# Altium PCB PowerPlane.PcbDoc (part 1 of 2)
Units mm, origin at the board's own origin, x right, y up, seen from the top; angles counter-clockwise.
Board outline 140 x 96 mm, 2 copper layers (Top Layer, Bottom Layer); 117 components, 76 nets, 342 pads, 71 vias.
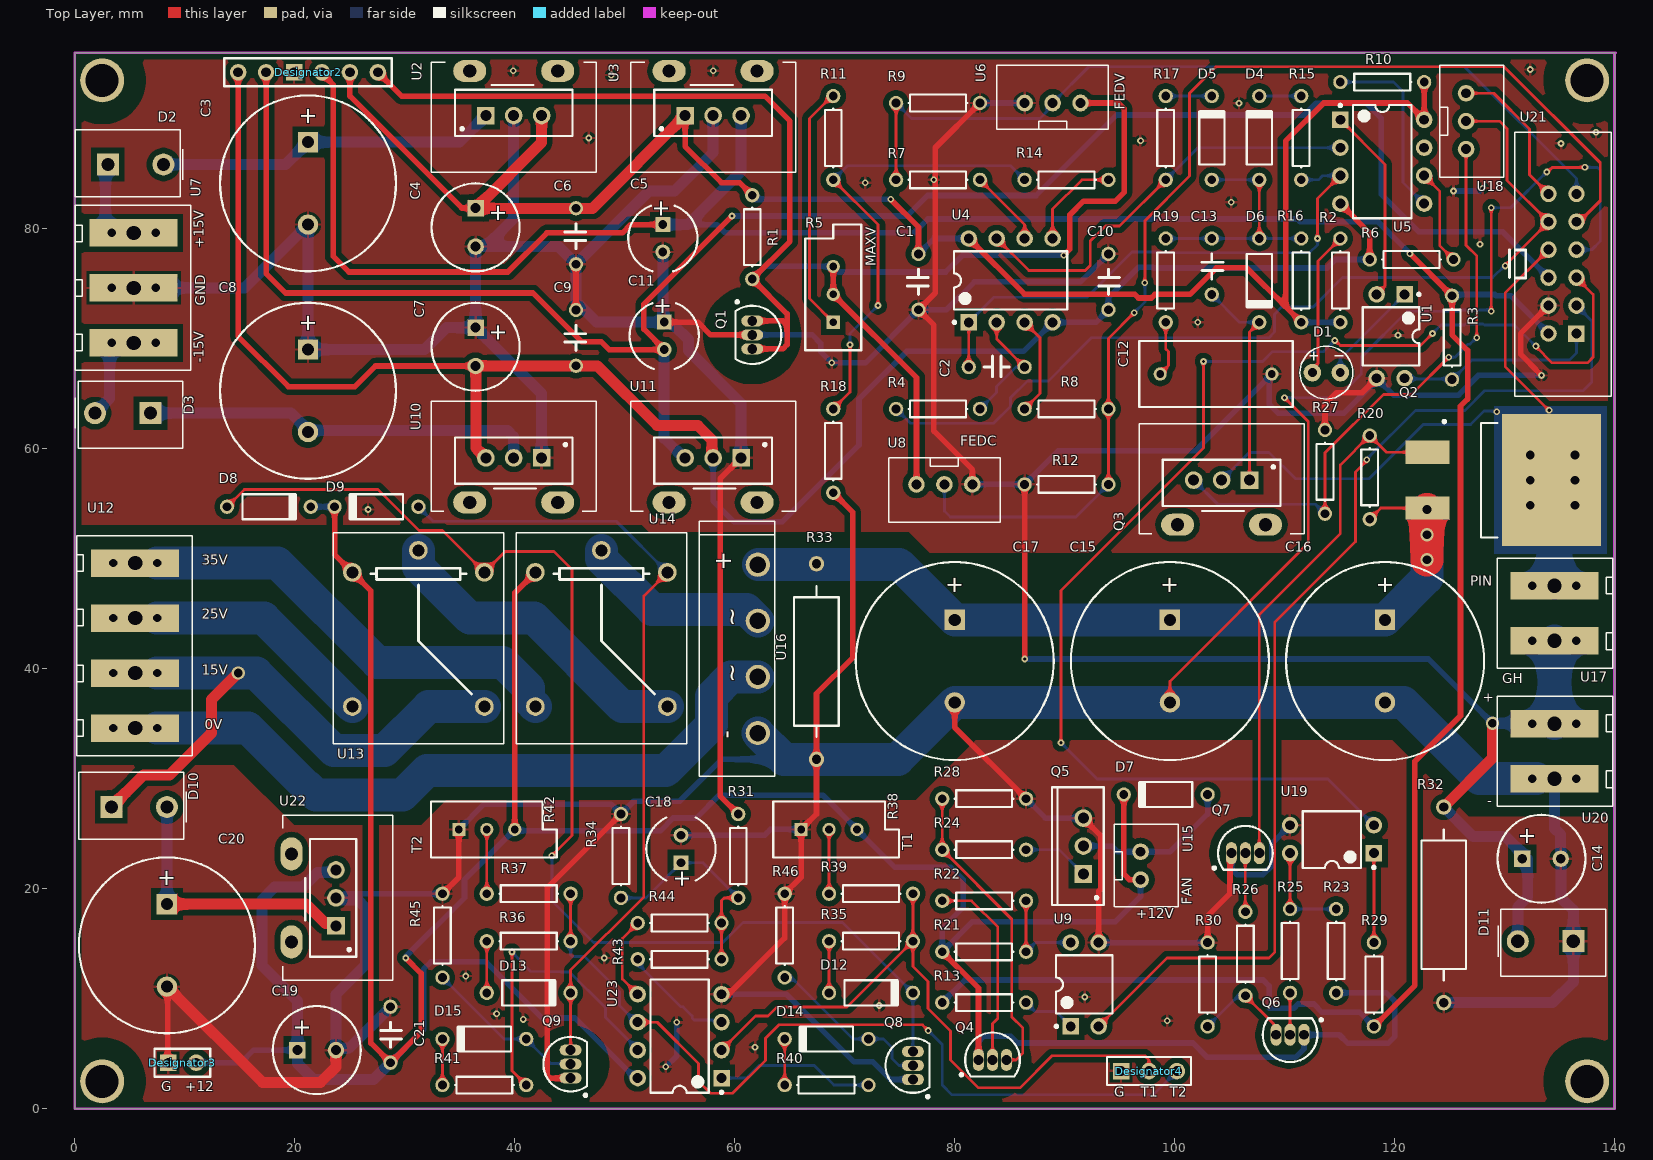
[diagram p0: Top Layer view]
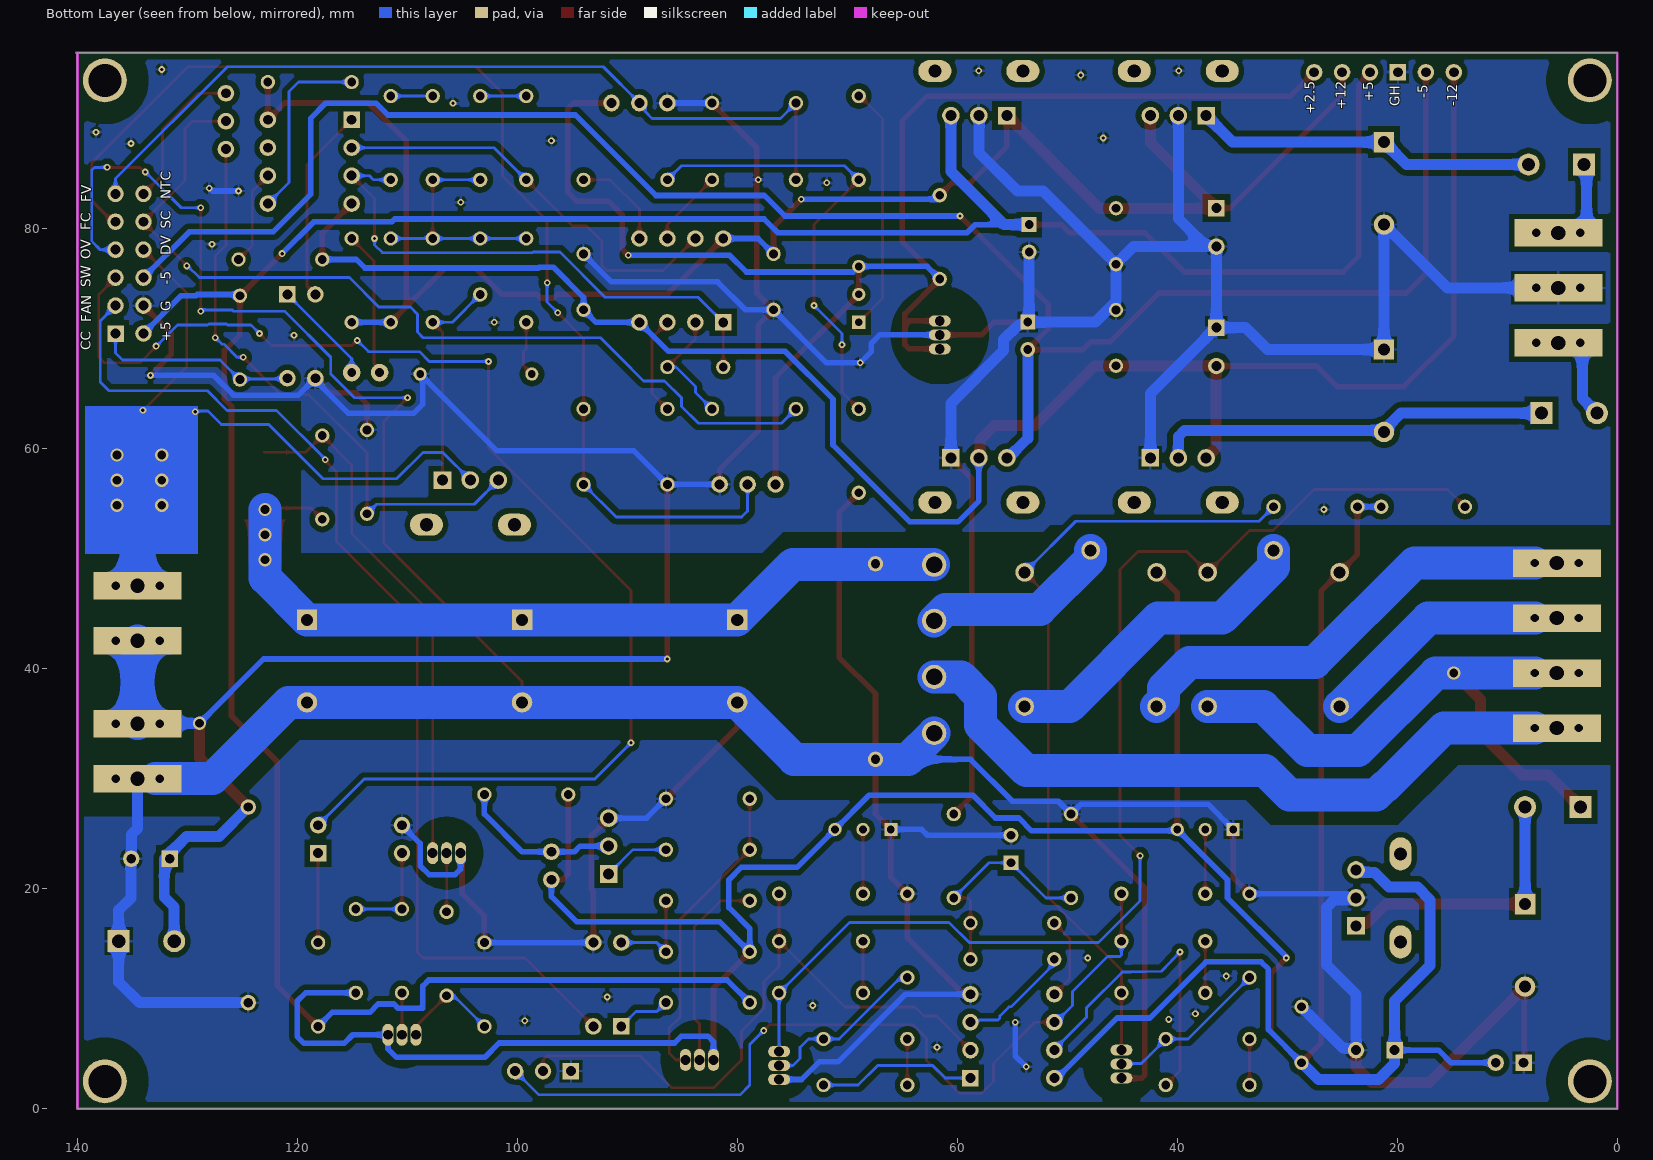
[diagram p1: Bottom Layer view, seen from below]

## Layer stack, top to bottom
Top Solder: solder mask 0.0102, Solder Resist, Dk 3.5
Top Layer: signal copper 0.0356
Dielectric 1: dielectric 0.32, FR-4, Dk 4.8
Bottom Layer: signal copper 0.0356
Bottom Solder: solder mask 0.0102, Solder Resist, Dk 3.5

## Board outline
0,0 0,96 140,96 140,0

## Design rules (kind name [scope] priority, off if disabled: settings)
Clearance Clearance_1 [WithinRoom('RoomDefinition1') or WithinRoom('RoomDefinition2') or  WithinRoom('RoomDefinition3') or  WithinRoom('RoomDefinition4') or  WithinRoom('RoomDefinition5') or  WithinRoom('RoomDefinition6') or WithinRoom('Corner1') or WithinRoom('Corner2') or        WithinRoom('Corner3') or        WithinRoom('Corner4') vs WithinRoom('RoomDefinition1') or WithinRoom('RoomDefinition2') or  WithinRoom('RoomDefinition3') or WithinRoom('RoomDefinition4') or  WithinRoom('RoomDefinition5') or  WithinRoom('RoomDefinition6') or WithinRoom('Corner1') or WithinRoom('Corner2') or        WithinRoom('Corner3') or        WithinRoom('Corner4')] p1: gap=0.15 ignorepadtopadclearanceinfootprint=TRUE
Clearance [Not (  WithinRoom('RoomDefinition4') or  WithinRoom('RoomDefinition5') or  WithinRoom('RoomDefinition6') or WithinRoom('Corner1') or WithinRoom('Corner2') or        WithinRoom('Corner3') or        WithinRoom('Corner4') ) vs Not (  WithinRoom('RoomDefinition4') or  WithinRoom('RoomDefinition5') or  WithinRoom('RoomDefinition6') or WithinRoom('Corner1') or WithinRoom('Corner2') or        WithinRoom('Corner3') or        WithinRoom('Corner4') )] p2: gap=0.508 ignorepadtopadclearanceinfootprint=TRUE except(1.016: Track-Track)
ComponentClearance [All] p1: gap=0.254 collisioncheckmode=3 verticalgap=0.254 showdistances=FALSE checkcomponentboundary=TRUE
Height [All] p1: minheight=0 maxheight=50.4 prefheight=12.7
HoleSize [All] p1: absolutevalues=TRUE maxlimit=3 minlimit=0.025 maxpercent=80.000 minpercent=20.000
MinimumSolderMaskSliver MinimumSolderMaskSliver_2 [HasFootprint('TO-226-AA') vs HasFootprint('TO-226-AA')] p1: minsoldermaskwidth=0.06
MinimumSolderMaskSliver MinimumSolderMaskSliver_1 [HasFootprint('TO-92A') vs HasFootprint('TO-92A')] p2: minsoldermaskwidth=0.06
MinimumSolderMaskSliver [All] p3: minsoldermaskwidth=0.254
PolygonConnect [All] p1: connectstyle=Relief reliefconductorwidth=0.254 reliefentries=4 polygonreliefangle="90 Angle" airgapwidth=0.254
RoomDefinition Corner4 [False] p1: confinementstyle=ConfineIn formatcopy=TRUE lockcomponents=FALSE outline 133.5,93.5 ccw(c137.5,93.5) 137.5,89.5 ccw(c137.5,93.5) 141.5,93.5 ccw(c137.5,93.5) 137.5,97.5 ccw(c137.5,93.5)
RoomDefinition Corner3 [False] p2: confinementstyle=ConfineIn formatcopy=TRUE lockcomponents=FALSE outline 133.5,2.5 ccw(c137.5,2.5) 137.5,-1.5 ccw(c137.5,2.5) 141.5,2.5 ccw(c137.5,2.5) 137.5,6.5 ccw(c137.5,2.5)
RoomDefinition Corner2 [False] p3: confinementstyle=ConfineIn formatcopy=TRUE lockcomponents=FALSE outline 2.5,-1.5 cw(c2.5,2.5) -1.5,2.5 cw(c2.5,2.5) 2.5,6.5 cw(c2.5,2.5) 6.5,2.5 cw(c2.5,2.5)
RoomDefinition Corner1 [False] p4: confinementstyle=ConfineIn formatcopy=TRUE lockcomponents=FALSE outline 2.5,89.5 cw(c2.5,93.5) -1.5,93.5 cw(c2.5,93.5) 2.5,97.5 cw(c2.5,93.5) 6.5,93.5 cw(c2.5,93.5)
RoomDefinition RoomDefinition1 [False] p5: confinementstyle=ConfineIn formatcopy=TRUE lockcomponents=FALSE outline 61.595,65.858 cw(c61.595,70.358) 57.095,70.358 cw(c61.595,70.358) 61.595,74.858 cw(c61.595,70.358) 66.095,70.358 cw(c61.595,70.358)
RoomDefinition RoomDefinition6 [False] p6: confinementstyle=ConfineIn formatcopy=TRUE lockcomponents=FALSE outline 107.34,6.731 ccw(c110.37,6.731) 110.37,3.702 ccw(c110.37,6.731) 113.399,6.731 ccw(c110.37,6.731) 110.37,9.76 ccw(c110.37,6.731)
RoomDefinition RoomDefinition5 [False] p7: confinementstyle=ConfineIn formatcopy=TRUE lockcomponents=FALSE outline 103.114,23.241 ccw(c106.426,23.241) 106.426,19.929 ccw(c106.426,23.241) 109.738,23.241 ccw(c106.426,23.241) 106.426,26.553 ccw(c106.426,23.241)
RoomDefinition RoomDefinition4 [False] p8: confinementstyle=ConfineIn formatcopy=TRUE lockcomponents=FALSE outline 79.629,4.445 ccw(c83.312,4.445) 83.312,0.762 ccw(c83.312,4.445) 86.995,4.445 ccw(c83.312,4.445) 83.312,8.128 ccw(c83.312,4.445)
RoomDefinition RoomDefinition3 [False] p9: confinementstyle=ConfineIn formatcopy=TRUE lockcomponents=FALSE outline 73.025,3.937 ccw(c76.2,3.937) 76.2,0.762 ccw(c76.2,3.937) 79.375,3.937 ccw(c76.2,3.937) 76.2,7.112 ccw(c76.2,3.937)
RoomDefinition RoomDefinition2 [False] p10: confinementstyle=ConfineIn formatcopy=TRUE lockcomponents=FALSE outline 41.565,4.064 ccw(c45.103,4.064) 45.103,0.526 ccw(c45.103,4.064) 48.641,4.064 ccw(c45.103,4.064) 45.103,7.602 ccw(c45.103,4.064)
RoutingVias [All] p1: holewidth=0.305 width=0.61 viastyle="Through Hole" minholewidth=0.305 minwidth=0.61 maxholewidth=1.2 maxwidth=0.85
SilkToSolderMaskClearance SilkToSolderMaskClearance_2 [HasFootprint('TO-226-AA') vs HasFootprint('TO-226-AA')] p1: minsilkscreentomaskgap=0.254 clearancetoexposedcopper=TRUE
SilkToSolderMaskClearance SilkToSolderMaskClearance_1 [HasFootprint('TO-92A') vs HasFootprint('TO-92A')] p2: minsilkscreentomaskgap=0.06 clearancetoexposedcopper=TRUE
SilkToSolderMaskClearance [IsPad] p3: minsilkscreentomaskgap=0.254 clearancetoexposedcopper=TRUE
SolderMaskExpansion [All] p1: expansion=0.102 istentingtop=FALSE
SupplyNets "Schematic Supply Nets_1" [InNet('GND')] p1: voltage=0.000
SupplyNets "Schematic Supply Nets" [InNet('+12')] p2: voltage=0.000
Width Width_1 [InNetClass('Power')] p1: maxlimit=3 minlimit=0.254 preferedwidth=0.508
Width [All] p2: maxlimit=3 minlimit=0.254 preferedwidth=0.254
25 further rules are at their usual default settings.

## Classes and differential pairs
net class Power: +2.5V_H +5V_H +12 +12V_H -5V_H -12V_H GND GND_H

## Components (designator, comment, footprint, x,y, rotation, side; value= is the part's Value field where it differs from the comment)
C1 "" RAD-0.2 76.708,75.184 r90 top value=104
C2 "BBC" RAD-0.2 83.82,67.437 r0 top value=471
C3 "35V" CAPPR7.5-16x25 21.209,84.137 r270 top value=3300uF
C4 "25V" CAPPR5-8x12 36.449,80.137 r270 top value=470uF
C5 "16V" CAPPR5-6.3x11 53.467,79.14 r270 top value=220uF
C6 "" RAD-0.2 45.571,79.329 r90 top value=104
C7 "25V" CAPPR5-8x12 36.449,69.278 r270 top value=470uF
C8 "35V" CAPPR7.5-16x25 21.209,65.278 r270 top value=3300uF
C9 "" RAD-0.2 45.571,70.086 r90 top value=104
C10 "" RAD-0.2 93.98,75.184 r270 top value=104
C11 "16V" CAPPR5-6.3x11 53.594,70.275 r270 top value=220uF
C12 "BBC" RAD-0.4-BBC 103.759,66.802 r0 top value=153
C13 "BBC" RAD-0.2 103.378,76.581 r270 top value=471
C14 "50V" CAPPR5-8x12 133.35,22.733 r0 top value=100uF
C15 "63V" CAPPR7.5-18x35.5 99.568,40.7 r270 top value=2200uF
C16 "63V" CAPPR7.5-18x35.5 119.126,40.7 r270 top value=2200uF
C17 "63V" CAPPR7.5-18x35.5 80.01,40.7 r270 top value=2200uF
C18 "50V" CAPPR5-6.3x15 55.118,23.622 r90 top value=47uF
C19 "25V" CAPPR5-8x12 21.999,5.334 r0 top value=470uF
C20 "35V" CAPPR7.5-16x25 8.382,14.859 r270 top value=3300uF
C21 "" RAD-0.2 28.702,6.731 r270 top value=104
D1 "CC" LED 113.792,66.929 r90 top
D2 "1N5408" DIO18.84-9.6x5.6-Vetical 5.016,85.852 r0 top
D3 "1N5408" DIO18.84-9.6x5.6-Vetical 4.889,63.246 r180 top
D4 "1N4007" DO-41 107.696,88.265 r90 top
D5 "1N4007" DO-41 103.378,88.265 r90 top
D6 "1N4007" DO-41 107.696,75.311 r270 top
D7 "1N4007" DO-41 99.187,28.575 r180 top
D8 "1N4007" DO-41 17.653,54.737 r0 top
D9 "1N4007" DO-41 27.432,54.737 r180 top
D10 "1N5408" DIO18.84-9.6x5.6-Vetical 5.334,27.432 r0 top
D11 "1N5408" DIO18.84-9.6x5.6-Vetical 134.239,15.24 r180 top
D12 "1N4007" DO-41 72.39,10.541 r0 top
D13 "1N4007" DO-41 41.275,10.541 r0 top
D14 "1N4728" DO-41 68.353,6.35 r180 top
D15 "1N4728" DO-41 37.238,6.35 r180 top
Designator2 "Comment" HDR1X6 14.859,94.234 r0 top
Designator3 "Comment" HDR1X2 8.509,4.191 r0 top
Designator4 "Comment" HDR1X3 95.123,3.429 r0 top
Q1 "TL431" TO-226-AA 61.595,70.358 r180 top
Q2 "F4905S" D2-PAK 130.739,57.15 r0 top
Q3 "TIP41" "TO-220AB - HEATSINK" 104.267,57.15 r180 top
Q4 "S8550" TO-92A 83.439,4.445 r270 top
Q5 "TIP41" TO-220AB 91.694,23.887 r90 top
Q6 "S8550" TO-92A 110.49,6.731 r90 top
Q7 "2N5551" TO-92A 106.426,23.241 r270 top
Q8 "S8050" TO-92A 76.2,3.937 r0 top
Q9 "S8050" TO-92A 45.085,4.064 r0 top
R1 "" AXIAL-0.3 61.595,79.248 r270 top value=2.7K
R2 "" AXIAL-0.3 115.062,75.311 r90 top value=2K
R3 "" AXIAL-0.3 125.222,70.104 r270 top value=10K
R4 "" AXIAL-0.3 78.486,63.627 r180 top value=100R
R5 "" VR5 68.961,74.041 r90 top value=5K
R6 "" AXIAL-0.3 121.539,77.216 r180 top value=10K
R7 "" AXIAL-0.3 78.486,84.455 r0 top value=100R
R8 "" AXIAL-0.3 90.17,63.627 r0 top value=100R
R9 "" AXIAL-0.3 78.486,91.44 r0 top value=1M
R10 "" AXIAL-0.3 118.872,93.345 r0 top value=10K
R11 "" AXIAL-0.3 68.961,88.265 r270 top value=6.8K
R12 "" AXIAL-0.3 90.17,56.769 r180 top value=1M
R13 "" AXIAL-0.3 82.677,9.652 r0 top value=1K
R14 "" AXIAL-0.3 90.17,84.455 r180 top value=100R
R15 "" AXIAL-0.3 111.506,88.265 r90 top value=100R
R16 "" AXIAL-0.3 111.506,75.311 r90 top value=3K
R17 "" AXIAL-0.3 99.187,88.265 r90 top value=100R
R18 "" AXIAL-0.3 68.961,59.817 r270 top value=100K
R19 "" AXIAL-0.3 99.187,75.311 r270 top value=33K
R20 "" AXIAL-0.3 117.729,57.404 r90 top value=10K
R21 "" AXIAL-0.3 82.677,14.273 r180 top value=10K
R22 "" AXIAL-0.3 82.677,18.909 r180 top value=4.7K
R23 "" AXIAL-0.3 114.681,14.351 r270 top value=10K
R24 "" AXIAL-0.3 82.677,23.558 r0 top value=2K
R25 "" AXIAL-0.3 110.49,14.351 r270 top value=4.7K
R26 "" AXIAL-0.3 106.426,14.097 r270 top value=2K
R27 "" AXIAL-0.3 113.665,57.912 r270 top value=1K
R28 "" AXIAL-0.3 82.677,28.194 r0 top value=10K
R29 "" AXIAL-0.3 118.11,11.303 r90 top value=1K
R30 "" AXIAL-0.3 102.997,11.303 r90 top value=10K
R31 "" AXIAL-0.3 60.325,22.987 r90 top value=330K
R32 "2W" AXIAL-0.7 124.46,18.542 r90 top value=30K
R33 "2W" AXIAL-0.7 67.437,40.66 r90 top value=4.3K
R34 "" AXIAL-0.3 49.657,22.987 r270 top value=150K
R35 "" AXIAL-0.3 72.39,15.24 r0 top value=56K
R36 "" AXIAL-0.3 41.275,15.24 r0 top value=100K
R37 "" AXIAL-0.3 41.275,19.558 r180 top value=10K
R38 "" VR5 68.58,25.4 r0 top value=10K
R39 "" AXIAL-0.3 72.39,19.558 r180 top value=10K
R40 "" AXIAL-0.3 68.353,2.159 r0 top value=2.7K
R41 "" AXIAL-0.3 37.238,2.159 r0 top value=2.7K
R42 "" VR5 37.465,25.4 r0 top value=10K
R43 "" AXIAL-0.3 54.991,13.589 r0 top value=100R
R44 "" AXIAL-0.3 54.991,16.891 r180 top value=100R
R45 "" AXIAL-0.3 33.428,15.748 r90 top value=10K
R46 "" AXIAL-0.3 64.543,15.748 r90 top value=10K
U1 "EL817C" PC817 120.904,74.041 r270 top
U2 "L7812" "TO-220AB - HEATSINK" 39.913,90.297 r0 top
U3 "L7805" "TO-220AB - HEATSINK" 58.039,90.297 r0 top
U4 "TL082" DIP-8 85.09,75.311 r90 top
U5 "LM393" DIP-8 118.872,86.106 r0 top
U6 "POT-3P" X254-3P 88.9,91.44 r180 top
U7 "POWER3" KF128-50-3P 5.363,74.629 r90 top
U8 "POT-3P" X254-3P 79.068,56.769 r0 top
U9 "EL817C" PC817 90.551,7.493 r90 top
U10 "L7912" "TO-220AB - HEATSINK" 39.913,59.182 r180 top
U11 "L7905" "TO-220AB - HEATSINK" 58.039,59.182 r180 top
U12 "POWER4" KF128-50-4P 5.493,42.118 r90 top
U13 "SDR12VDCSLC" SDR12VDCSLC 31.242,42.672 r0 top
U14 "SDR12VDCSLC" SDR12VDCSLC 47.879,42.672 r0 top
U15 "FAN" X254-2P 96.901,22.098 r90 top
U16 "KBU1010" KBU1010 62.103,34.163 r90 top
U17 "POWER2" KF128-50-2P 134.525,45.045 r270 top
U18 "REG3" X254-3P 126.492,89.789 r90 top
U19 "EL817C" PC817 118.11,23.241 r180 top
U20 "POWER2" KF128-50-2P 134.525,32.512 r270 top locked
U21 "DC3-12P" DC3-12P 136.532,70.485 r90 top
U22 "L7812" "TO-220AB - HEATSINK" 23.749,19.177 r90 top
U23 "LM358" DIP-8 54.991,6.604 r180 top

## Footprints (in the part's own frame and the unit in brackets; to place one, negate y for a bottom-side part, rotate by r counter-clockwise, add the part's x,y. Pads: shape width x height; smd on the part's side, far side on the other; paste and mask are expansions set on the pad)
AXIAL-0.3 [mm] "Axial Device, Thru-Hole; 2 Leads; 0.3 in Pin Spacing"
  round 1.3 hole 0.8: 1(-3.81,0) 2(3.81,0)
  silkscreen extent -2.67,-0.76 2.67,0.76, body extent -2.85,-1.16 2.85,1.14, height 2.45
AXIAL-0.7 [mm] "Axial Device, Thru-Hole; 2 Leads; 0.7 in Pin Spacing"
  round 1.4 hole 0.85: 1(-8.89,0) 2(8.89,0)
  silkscreen extent -6.86,-2.03 6.86,2.03, body extent -7.35,-2.41 7.35,2.39, height 4.9
CAPPR5-6.3x11 [mm] "Capacitor, Electrolytic, Radial; Body 6.3 x 11 mm (Dia.xH typ); Pin Spacing 5 mm (typ)"
  rect 1.35x1.35 hole 0.8: 1(-1.25,0)
  round 1.35 hole 0.8: 2(1.25,0)
  silkscreen extent -2.96,-3.15 3,3.15, body extent -3,-3 3,3, height 11
CAPPR5-6.3x15 [mm] "Capacitor, Electrolytic, Radial; Body 6.3 x 15 mm (Dia.xH typ); Pin Spacing 5 mm (typ)"
  rect 1.35x1.35 hole 0.8: 1(-1.25,0)
  round 1.35 hole 0.8: 2(1.25,0)
  silkscreen extent -2.85,-3.15 2.85,3.15, body extent -3,-3 3,3, height 13
CAPPR5-8x12 [mm] "Capacitor, Electrolytic, Radial; Body 8 x 12 mm (Dia.xH typ); Pin Spacing 5 mm (typ)"
  rect 1.5x1.5 hole 0.9: 1(-1.75,0)
  round 1.5 hole 0.9: 2(1.75,0)
  silkscreen extent -4,-4 4,4, body extent -4,-4 4,4, height 12
CAPPR7.5-16x25 [mm] "Capacitor, Electrolytic, Radial; Body 16 x 25 mm (Dia.xH typ); Pin Spacing 7.5 mm (typ)"
  rect 1.85x1.85 hole 1.1: 1(-3.75,0)
  round 1.85 hole 1.1: 2(3.75,0)
  silkscreen extent -8,-8 8,8, body extent -8,-8 8,8, height 25
CAPPR7.5-18x35.5 [mm] "Capacitor, Electrolytic, Radial; Body 18 x 35.5 mm (Dia.xH typ); Pin Spacing 7.5 mm (typ)"
  rect 1.85x1.85 hole 1.1: 1(-3.75,0)
  round 1.85 hole 1.1: 2(3.75,0)
  silkscreen extent -9,-9 9,9, body extent -9,-9 9,9, height 35.5
D2-PAK [mm] "D2-PAK, 4-Leads, Body 9.2x10.2mm, Pitch 2.54mm, Lead Span 15.4mm, IPC High Density"
  rect 4x2.1 smd: 1(-7.74,2.54) 3(-7.74,-2.54)
  rect 9x12 smd: 2(3.5,0)
  silkscreen extent -6.35,-5.2 -1.4,5.46, body extent -2.9,-5.2 6.5,5.2, height 4.6
DC3-12P [mm] "Connector; Header; 6x2 Position"
  rect 1.5x1.5 hole 0.9: 1(0,0)
  round 1.5 hole 0.9: 2(2.54,0) 3(5.08,0) 4(7.62,0) 5(10.16,0) 6(12.7,0) 7(12.7,2.54) 8(10.16,2.54) 9(7.62,2.54) 10(5.08,2.54) 11(2.54,2.54) 12(0,2.54)
  silkscreen extent -5.71,-3.18 18.29,6.1
DIO18.84-9.6x5.6-Vetical [mm] "Diode, Axial; Body 9.5 x 5.6 mm (LxDia. max), Lead Dia. 1.32 mm (max)"
  rect 2x2 hole 1.2: 1(-2,0)
  round 2 hole 1.2: 2(3.048,0)
  silkscreen extent -4.95,-2.92 4.83,3.17, body extent -4.9,-2.95 1.09,3.05, height 10
DIP-8 [mm] "DIP; 8 Leads; Row Spacing 7.62 mm; Pitch 2.54 mm"
  rect 1.5x1.5 hole 0.9: 1(-3.81,3.81)
  round 1.5 hole 0.9: 2(-3.81,1.27) 3(-3.81,-1.27) 4(-3.81,-3.81) 5(3.81,-3.81) 6(3.81,-1.27) 7(3.81,1.27) 8(3.81,3.81)
  silkscreen extent -3.93,-5.15 2.65,5.23, body extent -3.6,-5.15 3.6,5.15, height 5.08
DO-41 [mm] "Diode, Axial; Body 5.2 x 2.7 mm (LxDia. max), Lead Dia. 0.86 mm (max)"
  round 1.3 hole 0.8: 1(-3.81,0) 2(3.81,0)
  silkscreen extent -2.41,-1.14 2.54,1.14, body extent -2.46,-1.23 2.54,1.27, height 2.55
HDR1X2 [mm] "Connector; Header; 2 Position"
  rect 1.5x1.5 hole 0.9: 1(0,0)
  round 1.5 hole 0.9: 2(2.54,0)
  silkscreen extent -1.27,-1.27 3.81,1.27
HDR1X3 [mm] "Connector; Header; 3 Position"
  rect 1.5x1.5 hole 0.9: 1(0,0)
  round 1.5 hole 0.9: 2(2.54,0) 3(5.08,0)
  silkscreen extent -1.27,-1.27 6.35,1.27
HDR1X6 [mm] "Connector; Header; 6 Position"
  round 1.5 hole 0.9: 1(0,0) 2(2.54,0) 4(7.62,0) 5(10.16,0) 6(12.7,0)
  rect 1.5x1.5 hole 0.9: 3(5.08,0)
  silkscreen extent -1.27,-1.27 13.97,1.27
KBU1010 [mm]
  round 2.2 hole 1.5: 1(0,0) 2(5.1,0) 3(10.2,0) 4(15.3,0)
  silkscreen extent -3.95,-1.52 19.25,5.33, body extent -3.94,-1.52 19.18,5.33, height 19.3
KF128-50-2P [mm] "KF128-50-2P"
  round 1.524 hole 0.762 mask+0: 1(-2.5,2) 1(-2.5,-2) 2(2.5,2) 2(2.5,-2)
  rect 2.5x8 hole 1.3: 1(-2.5,0) 2(2.5,0)
  silkscreen extent -5,-5.2 5,5.3, body extent -4.95,-5.21 4.95,5.33, height 14
KF128-50-3P [mm] "KF128-50-3P"
  round 1.524 hole 0.762 mask+0: 1(5,-2) 1(5,2) 2(0,2) 2(0,-2) 3(-5,-2) 3(-5,2)
  rect 2.5x8 hole 1.3: 1(5,0) 2(0,0) 3(-5,0)
  silkscreen extent -7.5,-5.2 7.5,5.3, body extent -7.49,-5.21 7.49,5.33, height 7
KF128-50-4P [mm] "KF128-50-4P"
  round 1.524 hole 0.762 mask+0: 1(7.5,-2) 1(7.5,2) 2(2.5,-2) 2(2.5,2) 3(-2.5,-2) 3(-2.5,2) 4(-7.5,-2) 4(-7.5,2)
  rect 2.5x8 hole 1.3: 1(7.5,0) 2(2.5,0) 3(-2.5,0) 4(-7.5,0)
  silkscreen extent -10,-5.2 10,5.3, body extent -10.03,-5.21 10.03,5.33, height 7
LED [mm] "LED; 2 Leads"
  round 1.6 hole 0.8: 1(0,1.27) 2(0,-1.27)
  silkscreen extent -2.4,-2.4 2.4,2.4
PC817 [mm] "PC817"
  rect 1.5x1.5 hole 0.9: 1(0,0)
  round 1.5 hole 0.9: 2(0,-2.54) 3(7.62,-2.54) 4(7.62,0)
  silkscreen extent -0.12,-3.81 6.46,1.43, body extent 0.21,-3.81 7.41,1.34, height 5.08
RAD-0.2 [mm] "Radial Cap, Thru-Hole; 2 Leads; 0.2 in Pin Spacing"
  round 1.3 hole 0.8: 1(-2.54,0) 2(2.54,0)
  silkscreen extent -1.14,-0.89 1.14,1.02, body extent -2.54,-1.91 2.54,2.03, height 6
RAD-0.4-BBC [mm] "Radial Cap, Thru-Hole; 2 Leads; 0.4 in Pin Spacing"
  round 1.2 hole 0.7: 1(-5.08,0) 2(5.08,0)
  silkscreen extent -6.98,-3 6.98,3
SDR12VDCSLC [mm] "SDR12VDCSLC"
  round 1.7 hole 1.1: 1(-6,6.1) 2(0,8.1) 3(6,6.1) 4(6,-6.1) 5(-6,-6.1)
  silkscreen extent -7.75,-9.5 7.75,9.7, body extent -7.75,-9.53 7.75,9.65, height 15.8
TO-92A [mm] "TO, Flat Index; 3 In-Line, Axial Leads; Body Dia. 4.5mm; Leads 0.51 x 0.48 mm (max)"
  oval 2x1 hole 0.9: 1(0,1.27) 2(0,0) 3(0,-1.27)
  silkscreen extent -2.48,-2.95 1.5,2.48, body extent -2.48,-2.5 1.5,2.5, height 6.86
TO-220AB [mm] "TO, Thru-Hole, Vertical, Heatsink Mounted; 3 In-Line Leads; Pitch 2.54 mm"
  rect 1.6x1.6 hole 1: 1(-2.54,0)
  round 1.6 hole 1: 2(0,0) 3(2.54,0)
  silkscreen extent -5.35,-1.85 5.35,2.85, body extent -5.4,-1.9 5.4,2.9, height 19.3
"TO-220AB - HEATSINK" [mm] "TO, Thru-Hole, Vertical, Heatsink Mounted; 3 In-Line Leads; Pitch 2.54 mm, with heat sink."
  oval 3x2 hole 1.2: 0(-4,4.05) 0(4,4.05)
  rect 1.6x1.6 hole 1: 1(-2.54,0)
  round 1.6 hole 1: 2(0,0) 3(2.54,0)
  silkscreen extent -7.5,-5.15 7.5,4.85, body extent -7.49,-5.08 7.49,4.83, height 20
TO-226-AA [mm] "TO, Flat Index; 3 In-Line, Axial Leads; Body Dia. 4.8mm; Leads 0.55 x 0.51 mm (max)"
  oval 2x1 hole 0.9: 1(0,-1.27) 2(0,0) 3(0,1.27)
  silkscreen extent -2.65,-3.13 1.52,2.65, body extent -2.65,-2.66 1.52,2.66, height 5.33
VR5 [mm] "Thru-Hole; 3 Leads"
  round 1.2 hole 0.7: 1(2.54,0) 3(0,0)
  rect 1.2x1.2 hole 0.7: 2(-2.54,0)
  silkscreen extent -5.08,-2.54 6.35,2.54, body extent -4.95,-2.29 4.95,2.29, height 10
X254-2P [mm] "X254-2P"
  oval 1.5x1.524 hole 0.9: 1(-1.27,0) 2(1.27,0)
  silkscreen extent -3.75,-3.43 3.75,2.41, body extent -3.68,-3.43 3.68,2.29, height 7
X254-3P [mm] "X254-3P"
  oval 1.5x1.524 hole 0.9: 1(-2.54,0) 2(0,0) 3(2.54,0)
  silkscreen extent -5.08,-3.43 5.08,2.41, body extent -5.08,-3.43 5.08,2.29, height 7

## Part data
C1 C2 C6 C9 C10 C12 C13 C21: library part Cap, "Capacitor", LatestRevisionDate=17-Jul-2002, LatestRevisionNote="Re-released for DXP Platform.", PackageDescription="Radial Cap, Thru-Hole; 2 Leads; 0.3 in Pin Spacing", PackageReference=RAD-0.3, Published=8-Jun-2000, Publisher="Altium Limited"
C3 C4 C5 C7 C8 C11 C14 C15 C16 C17 C18 C19 C20: library part "Cap Pol1", "Polarized Capacitor (Radial)", LatestRevisionDate=17-Jul-2002, LatestRevisionNote="Re-released for DXP Platform.", PackageDescription="Polarized Capacitor (Radial); 2 Leads", PackageReference=RB7.6-15, Published=8-Jun-2000, Publisher="Altium Limited"
D1: library part LED1, "Typical RED GaAs LED", LatestRevisionDate=08-Jul-2005, LatestRevisionNote="Mech Layer 1 removed.", PackageDescription="LED; 2 Leads", PackageReference=LED-1, Published=8-Jun-2000, Publisher="Altium Limited"
D2 D3 D4 D5 D6 D7 D8 D9 D10 D11 D12 D13: library part "Diode 1N4007", "1 Amp General Purpose Rectifier", Code_JEDEC=DO-204-AL, ComponentLink1Description="Manufacturer Link", ComponentLink1URL=http://www.fairchildsemi.com/, ComponentLink2Description=Datasheet, ComponentLink2URL=http://www.fairchildsemi.com/ds/1N%2F1N4001.pdf, DatasheetVersion=1998, LatestRevisionDate=17-Jul-2002, LatestRevisionNote="Re-released for DXP Platform.", PackageDescription="Diode, Axial; Body 5.2 x 2.7 mm (LxDia. max), Lead Dia. 0.86 mm (max)", PackageReference=DO-41, PackageVersion=Aug-1999, Published=8-Jun-2000, Publisher="Altium Limited"
D14 D15: library part "D Zener", "Zener Diode", LatestRevisionDate=17-Jul-2002, LatestRevisionNote="Re-released for DXP Platform.", PackageDescription="Diode, Thru-Hole; 2 Leads; 0.7 in Pin Spacing", PackageReference=DIODE-0.7, Published=8-Jun-2000, Publisher="Altium Limited"
Q2: library part PMOS-2, "P-Channel Power MOSFET", ComponentLink1Description="Manufacturer Link", ComponentLink1URL=http://www.irf.com/, DatasheetVersion=PD-9.390D, LatestRevisionDate=17-Jul-2002, LatestRevisionNote="Re-released for DXP Platform.", Note="Pin 4 not drawn and electrically connected to Pin 2.", PackageDescription="TO, Thru-Hole, Vertical, Heatsink Mounted; 3 In-Line Leads; Pitch 2.54 mm", PackageReference=TO-220AB, PackageVersion=Feb-1997, Published=8-Jun-2000, Publisher="Altium Limited"
Q3 Q5 Q7 Q8 Q9: library part NPN, "NPN Bipolar Transistor", Code_JEDEC=TO-226-AA, LatestRevisionDate=17-Jul-2002, LatestRevisionNote="Re-released for DXP Platform.", PackageDescription="TO, Flat Index; 3 In-Line, Axial Leads; Body Dia. 4.8mm; Leads 0.55 x 0.51 mm (max)", PackageReference=TO-226-AA, Published=8-Jun-2000, Publisher="Altium Limited"
Q4 Q6: library part PNP, "PNP Bipolar Transistor", LatestRevisionDate=29-May-2009, LatestRevisionNote="IPC-7351 Footprint Added.", PackageDescription="3-Pin SOT-23 Package 0.95 mm Pitch, 2.4 mm Lead Span", PackageReference=SOT-23B, PackageVersion=Aug-1999, Published=8-Jun-2000, Publisher="Altium Limited"
R1 R2 R3 R4 R6 R7 R8 R9 R10 R11 R12 R13 R14 R15 R16 R17 R18 R19 R20 R21 R22 R23 R24 R25 R26 R27 R28 R29 R30 R31 R32 R33 R34 R35 R36 R37 R39 R40 R41 R43 R44 R45 R46: library part Res1, "Resistor", LatestRevisionDate=17-Jul-2002, LatestRevisionNote="Re-released for DXP Platform.", PackageDescription="Axial Device, Thru-Hole; 2 Leads; 0.3 in Pin Spacing", PackageReference=AXIAL-0.3, Published=8-Jun-2000, Publisher="Altium Limited"
R5 R38 R42: library part RPot, "Potentiometer", LatestRevisionDate=17-Jul-2002, LatestRevisionNote="Re-released for DXP Platform.", PackageDescription="Variable Resistor, Thru-Hole; 3 Leads", PackageReference=VR5, Published=8-Jun-2000, Publisher="Altium Limited", Set Position=0.5, Sim Note="Enter the Resistance value and the set point into parameter fields."
U7 U12: "Power Connector 3"
U18: "REG2"

## Free pads (board coordinates)
  round 4 hole 3: 0(2.5,2.5) 0(2.5,93.5) 0(137.5,2.5) 0(137.5,93.5)

## Via types
v1: diameter 0.61, hole 0.305, Top Layer to Bottom Layer, 60 vias
v2: diameter 1.2, hole 0.8, Top Layer to Bottom Layer, 11 vias

## Nets (pads, with @x,y where several pads share a name; then routed paths per layer and width w, separated by ;. In a path a pad name is that pad's centre, name@x,y a point inside that pad or via, vN(x,y) a via of type N, cw(c..) or ccw(c..) an arc to the next point about the centre after c; other vN are vias at no path point)
+2.5V_H: Designator2.6 Q1.1 Q1.3 R1.2 R5.1 R5.3 U6.1 U8.1 | length 143.1
  Top Layer w0.508: Designator2.6@27.559,94.234 29.726,92.067 62.746,92.067 65.024,89.789 65.024,78.867 R1.2@61.595,75.438 64.77,72.263 64.77,71.247 ; Q1.3@61.595,69.088 64.389,69.088 64.77,69.469 64.77,71.247 ; Q1.1@61.595,71.628 64.389,71.628 64.77,71.247 ; R5.1@68.961,76.581 R5.3@68.961,74.041 76.528,66.474 U8.1@76.528,56.769 ; v1(89.916,77.597) 90.475,78.156 90.475,81.28 91.719,82.525 94.615,82.525 95.402,83.312 95.402,90.932 94.894,91.44 U6.1@91.44,91.44
  Bottom Layer w0.508: R1.2@61.595,75.438 62.738,76.581 R5.1@68.961,76.581 69.469,76.073 79.172,76.073 80.696,77.597 v1(89.916,77.597)
+5V_H: C5.1 Designator2.4 R3.1 R13.1 R29.1 U3.3 U21.12 | length 263.2
  Top Layer w0.508: Designator2.4@22.479,94.234 22.479,94.128 23.495,93.112 23.495,77.514 24.936,76.073 39.37,76.073 42.926,79.629 49.784,79.629 50.545,80.39 C5.1@53.467,80.39 ; R29.1@118.11,7.493 121.844,11.227 121.844,31.598 125.984,35.738 125.984,63.877 126.634,64.527 126.634,68.953 125.222,70.365 R3.1@125.222,73.914 v1(121.387,77.749)
  Bottom Layer w0.508: C5.1@53.467,80.39 55.752,80.39 58.373,80.39 59.122,79.641 76.31,79.641 77.059,80.39 77.568,80.899 111.15,80.899 111.404,80.645 118.491,80.645 v1(121.387,77.749) ; R13.1@78.867,9.652 80.924,11.709 108.052,11.709 108.585,11.176 108.585,9.398 108.839,9.144 ; 108.592,9.144 108.839,9.144 ; 111.224,9.525 110.843,9.144 108.839,9.144 ; 111.471,9.525 112.649,9.525 113.411,8.763 116.84,8.763 R29.1@118.11,7.493 ; R3.1@125.222,73.914 125.337,74.029 129.102,74.029 129.216,73.914 130.563,73.914 U21.12@133.992,70.485
  Bottom Layer w1: C5.1@53.467,80.39 55.752,80.39 60.579,85.217 U3.3@60.579,90.297
+12: C19.1 C21.2 D7.2 D8.2 D9.2 Designator3.2 Q4.3 Q6.3 R21.2 R23.2 R38.1 R42.1 U13.1 U14.1 U15.1 U22.3 U23.8 | length 329.6
  Top Layer w0.508: D9.2@23.622,54.61 23.622,50.392 U13.1@25.242,48.772 26.924,47.09 26.924,5.969 C21.2@28.702,4.191 31.496,6.985 31.496,12.319 v1(30.099,13.716) ; R42.1@40.005,25.4 40.005,46.898 U14.1@41.879,48.772 ; R21.2@78.867,14.273 82.169,10.971 82.169,6.985 Q4.3@82.169,4.445 ; D7.2@95.377,28.575 95.377,21.336 95.885,20.828 U15.1@96.901,20.828
  Bottom Layer w0.508: Designator3.2@11.049,4.191 15.113,4.191 16.256,5.334 C19.1@20.249,5.334 C19.1@20.32,5.334 ; D8.2@21.463,54.737 D9.2@23.622,54.737 ; C21.2@28.702,4.191 31.725,7.214 31.725,12.7 32.385,13.36 37.389,13.36 42.494,8.255 45.466,8.255 50.927,2.794 U23.8@51.181,2.794 ; v1@30.035,13.779 35.433,19.177 35.433,20.828 R42.1@40.005,25.4 40.005,25.273 53.238,25.273 54.405,26.44 56.527,26.44 58.599,28.511 68.008,28.511 R38.1@71.12,25.4 74.574,21.946 79.654,21.946 80.772,20.828 80.772,18.288 78.867,16.383 R21.2@78.867,14.273 81.612,17.018 94.615,17.018 96.901,19.304 U15.1@96.901,20.828 ; Q4.3@82.169,4.445 82.169,6.096 82.677,6.604 85.09,6.604 85.713,5.981 101.649,5.981 102.958,4.671 109.647,4.671 ; 109.4,4.671 110.977,4.671 111.76,5.454 Q6.3@111.76,6.731 113.399,6.731 114.96,6.731 115.748,5.944 119.38,5.944 120.015,6.579 120.015,9.779 119.253,10.541 R23.2@114.681,10.541
  Bottom Layer w1: U22.3@23.749,21.717 23.634,21.602 23.21,21.602 23.101,21.493 22.073,21.493 20.741,20.161 18.181,20.161 17.018,18.998 17.018,13.045 20.249,9.814 C19.1@20.249,5.334 20.249,4.135 21.717,2.667 27.178,2.667 C21.2@28.702,4.191
+12V_H: C1.2 C4.1 C6.2 Designator2.5 R1.1 R2.1 R10.2 R16.1 U2.3 U3.1 U4.8 U5.8 | length 157.5
  Top Layer w0.508: Designator2.5@25.019,94.234 25.019,92.075 35.207,81.887 C4.1@36.449,81.887 ; U3.1@55.499,90.297 55.499,87.503 58.801,84.201 60.452,84.201 R1.1@61.595,83.058 ; v1(74.181,82.689) 76.708,80.162 C1.2@76.708,77.724 ; U4.8@81.28,79.121 86.339,74.062 96.361,74.062 96.712,73.711 97.87,73.711 98.2,74.041 101.381,74.041 103.794,76.454 106.553,76.454 110.084,72.923 ; R16.1@111.506,71.501 110.084,72.923 ; R10.2@122.682,93.345 U5.8@122.682,89.916 121.158,91.44 113.55,91.44 110.084,87.974 110.084,72.923
  Top Layer w1: C4.1@36.736,82.137 42.452,87.854 U2.3@42.452,90.297 ; C4.1@36.83,81.869 C6.2@45.571,81.869 47.071,81.869 U3.1@55.499,90.297
  Bottom Layer w0.508: R1.1@61.595,83.058 61.964,82.689 v1(74.181,82.689) ; C1.2@76.708,77.724 78.105,79.121 U4.8@81.28,79.121 ; R16.1@111.506,71.501 R2.1@115.062,71.501
-5V_H: C11.2 Designator2.2 U11.3 U21.10 | length 173.3
  Top Layer w0.508: Designator2.2@17.399,94.234 17.399,75.946 19.177,74.168 41.656,74.168 46.101,69.723 47.879,69.723 48.577,69.025 53.53,69.025 C11.2@53.594,68.961 ; C11.2@53.594,69.025 51.74,70.879 51.74,73.152 v1(59.753,81.165)
  Bottom Layer w0.508: v1(59.753,81.165) 75.679,81.165 77.546,83.033 87.401,83.033 94.717,90.348 111.776,90.348 112.856,91.428 117.418,91.428 118.796,90.05 118.796,83.134 122.199,79.731 129.826,79.731 U21.10@133.992,75.565
  Bottom Layer w1: C11.2@53.594,69.025 53.594,60.96 U11.3@55.372,59.182
-12V_H: C7.2 C9.1 C10.2 Designator2.1 R6.2 U4.4 U5.4 U10.3 U11.2 | length 166.6
  Top Layer w0.508: Designator2.1@14.859,94.234 14.859,70.231 19.431,65.659 25.474,65.659 27.343,67.528 36.358,67.528 C7.2@36.449,67.437 ; U5.4@115.062,82.296 117.729,79.629 R6.2@117.729,77.216
  Top Layer w1: U10.3@37.372,59.182 36.467,60.087 36.467,67.546 C9.1@45.571,67.546 47.516,67.546 52.959,62.103 56.642,62.103 57.924,60.821 57.924,59.297 U11.2@58.039,59.182
  Bottom Layer w0.508: U11.2@58.039,59.182 58.039,55.27 59.944,53.365 64.313,53.365 71.298,60.35 71.298,64.516 75.641,68.859 86.258,68.859 U4.4@88.9,71.501 92.837,71.501 C10.2@93.98,72.644 93.98,73.773 96.712,76.505 98.01,76.505 98.076,76.439 113.856,76.439 114.633,77.216 R6.2@117.729,77.216
CC: R3.2 U1.4 U21.1 | length 18.5
  Bottom Layer w0.254: U1.4@120.904,66.421 120.968,66.358 125.158,66.358 R3.2@125.222,66.294 125.24,66.294 127.018,68.072 135.89,68.072 136.532,68.714 U21.1@136.532,70.485
FAN: U9.2 U21.2 | length 98
  Top Layer w0.254: U9.2@93.091,7.493 99.314,13.716 108.585,13.716 109.093,14.224 109.093,44.221 116.434,51.562 116.434,57.884 117.453,58.904 v1(117.453,59)
  Bottom Layer w0.254: v1(117.453,59) 117.544,59.091 117.544,59.142 121.887,63.485 126.386,63.485 128.179,65.278 137.138,65.278 137.922,66.062 137.922,71.635 U21.2@136.532,73.025
FAN_L: R21.1 R22.1 U9.4 | length 9
  Top Layer w0.254: R21.1@86.487,14.273 R22.1@86.487,18.909
  Bottom Layer w0.254: R21.1@86.487,14.273 87.327,15.113 U9.4@90.551,15.113
FED_C: R8.2 R12.1 U8.2 U21.5 | length 105.8
  Top Layer w0.254: R12.1@93.98,56.769 R8.2@93.98,63.627 93.98,70.039 v1(96.313,72.372) ; v1(97.291,75.108) 97.291,80.742 101.346,84.797 101.346,92.329 103.759,94.742 129.957,94.742 138.693,86.006 138.693,82.559 136.779,80.645 U21.5@136.532,80.645
  Bottom Layer w0.254: U8.2@79.068,56.769 79.068,54.333 79.604,53.797 91.008,53.797 R12.1@93.98,56.769 ; v1(96.313,72.372) 97.291,73.35 v1(97.291,75.108)
FED_V: R7.1 R9.1 U6.2 U21.6 | length 77.4
  Top Layer w0.254: R7.1@74.676,84.455 R9.1@74.676,91.44
  Bottom Layer w0.254: R9.1@74.676,91.44 76.073,90.043 87.757,90.043 88.367,90.653 88.367,91.44 U6.2@88.9,91.44 88.9,91.452 92.19,94.742 126.365,94.742 136.532,84.575 U21.6@136.532,83.185